# EAGLE board shift2 (EAGLE 5.06)
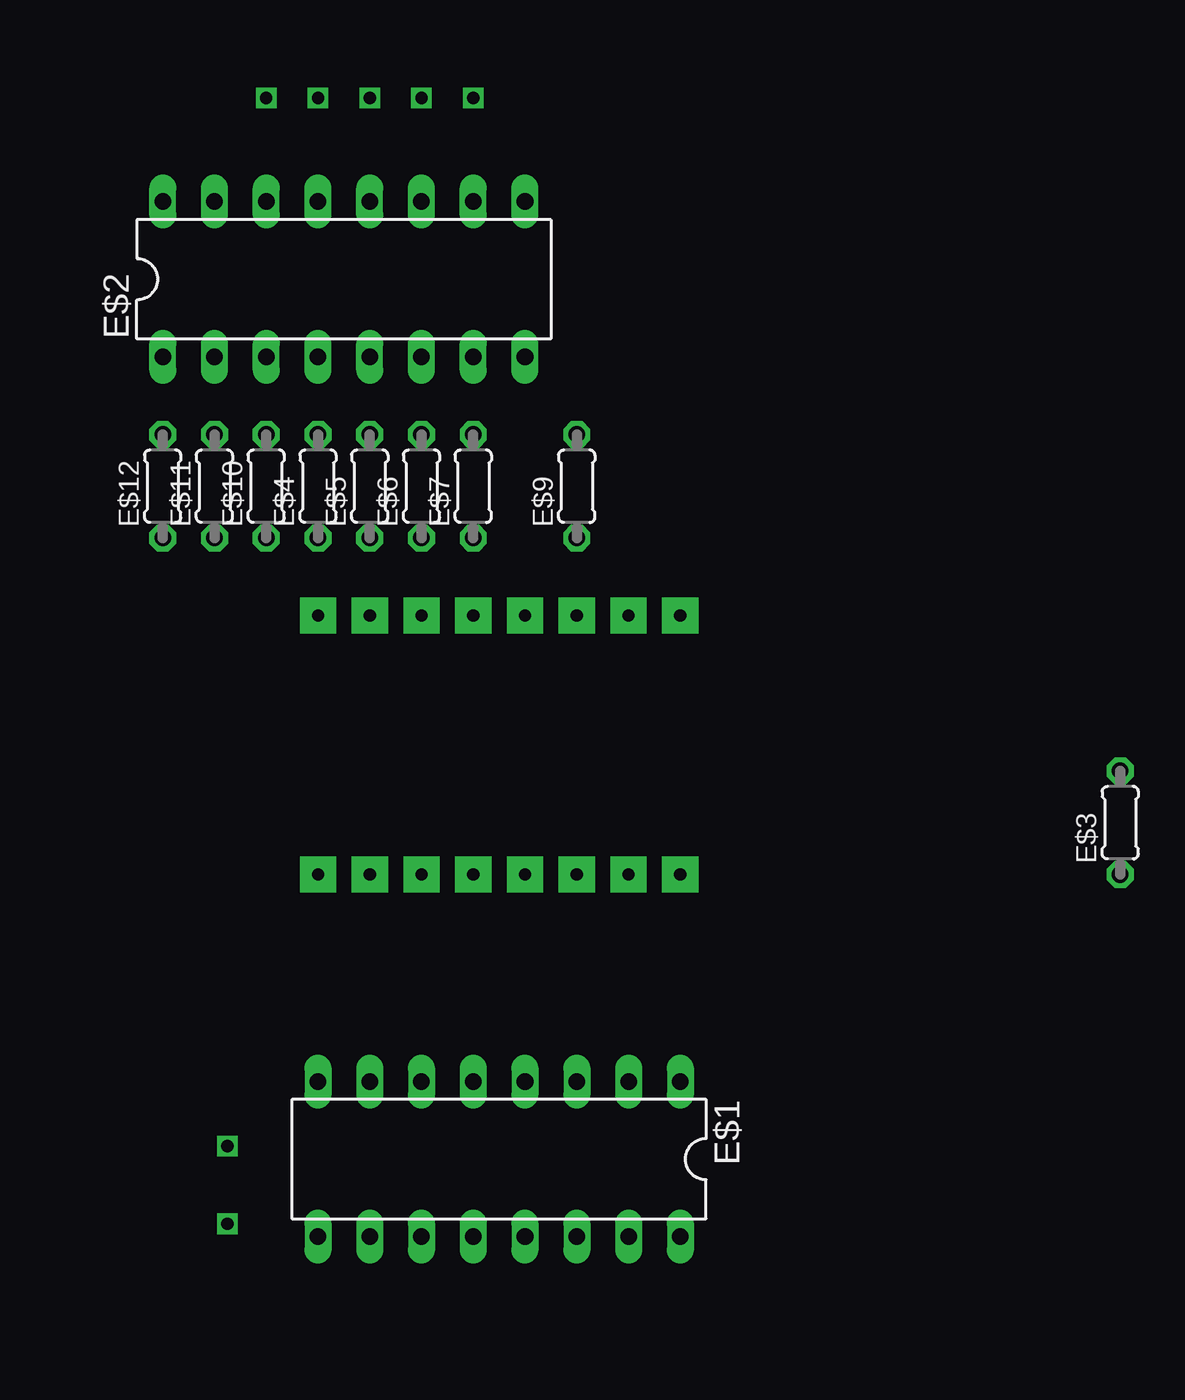
[diagram p0: board, top side]
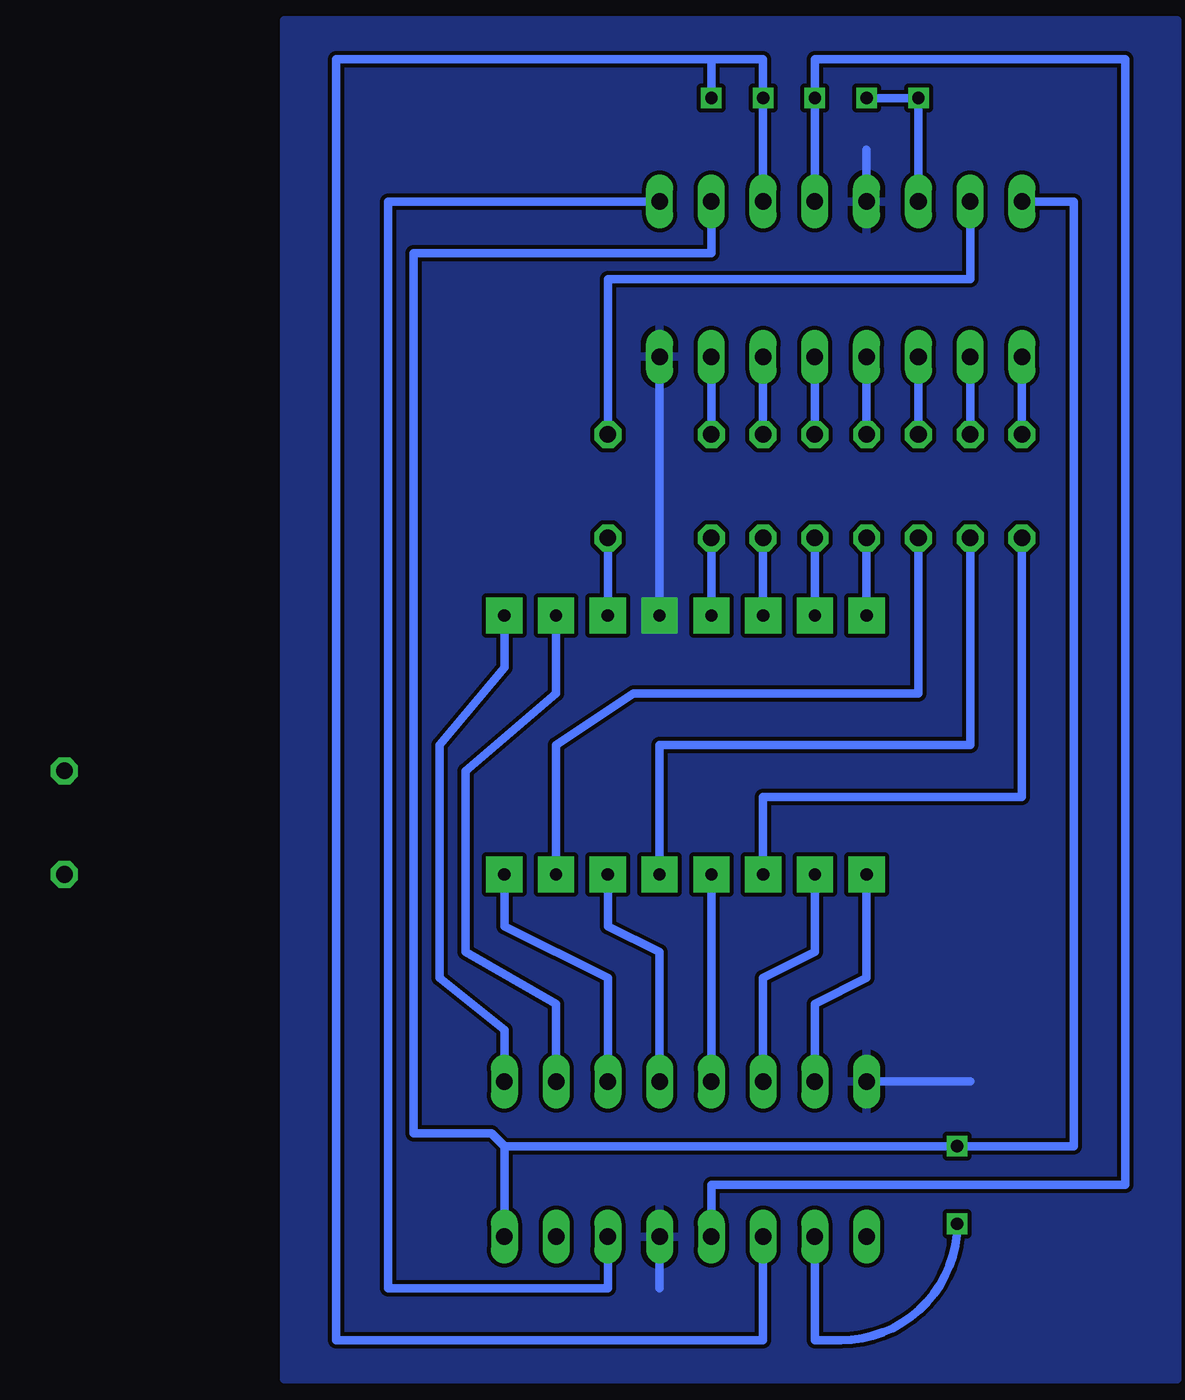
[diagram p1: board, bottom side, seen from below]

No outline drawn. Coordinates in mm, seen from the top.
Copper layers (1*16): Top 0.035mm / dielectric 1.5mm / Bottom 0.035mm
Design rules "default": minimum track width 10mil, minimum drill 24mil, track to track 8mil, track to pad 8mil, pad to pad 8mil, via to via 8mil, smd to smd 8mil, copper to edge 40mil, drill to drill 8mil, minimum pad ring 10mil, minimum via ring 8mil, stop-mask expansion 4mil, vias tented up to drill 0mil, thermal gap 10mil

## Footprints (pad centres in the part's own frame; a part is rotated, then mirrored left to right if it is on the bottom)
DIL16 = drill 0.813 long: 1 -8.89,-3.81; 2 -6.35,-3.81; 3 -3.81,-3.81; 4 -1.27,-3.81; 5 1.27,-3.81; 6 3.81,-3.81; 7 6.35,-3.81; 8 8.89,-3.81; 9 8.89,3.81; 10 6.35,3.81; 11 3.81,3.81; 12 1.27,3.81; 13 -1.27,3.81; 14 -3.81,3.81; 15 -6.35,3.81; 16 -8.89,3.81
0204/5 = drill 0.813 octagon: 1 -2.54,0; 2 2.54,0

## Placement (x,y rotation side)
E$1  [DIL16]  24.13,11.43 180 top
E$2  [DIL16]  16.51,54.61 0 top
E$3  [0204/5]  54.61,27.94 90 top
E$4  [0204/5]  15.24,44.45 90 top
E$5  [0204/5]  17.78,44.45 90 top
E$6  [0204/5]  20.32,44.45 90 top
E$7  [0204/5]  22.86,44.45 90 top
E$9  [0204/5]  27.94,44.45 90 top
E$10  [0204/5]  12.7,44.45 90 top
E$11  [0204/5]  10.16,44.45 90 top
E$12  [0204/5]  7.62,44.45 90 top

## Library data of the parts
E$1 E$2 = 40xx
E$3-E$7 E$9-E$12 = rcl

## Nets
+5V: E$1.16 E$2.16
GND: E$1.8 E$1.13 E$2.8 E$2.13
S$1: E$1.7
S$2: E$1.6
S$3: E$12.1
S$4: E$1.5
S$5: E$11.1
S$6: E$5.1
S$7: E$2.1 E$12.2
S$8: E$1.12 E$2.12
S$9: E$4.1
S$10: E$7.1
S$11: E$6.1
S$12: E$2.15 E$9.2
S$13: E$10.1
S$14: E$1.3
S$15: E$1.2
S$16: E$1.14 E$2.9
S$17: E$1.4
S$18: E$1.1
S$20: E$1.10
S$21: E$2.14
S$22: E$9.1
S$23: E$1.11 E$2.11
S$24: E$2.2 E$11.2
S$25: E$2.3 E$10.2
S$26: E$2.4 E$4.2
S$27: E$2.5 E$5.2
S$28: E$2.6 E$6.2
S$29: E$2.7 E$7.2

## Tracks (layer width: path | path; a pad name or v marks a point on that pad's centre or on a via)
+5V  (via drill 0.6)
  Bottom 0.406: 22.86,57.78 22.86,55.88 37.47,55.88 37.47,12.7 33.66,12.7 33.02,12.06 | 33.02,12.06 E$1.16 | 33.02,12.06 v10.79,12.06 5.08,12.06 5.08,58.42 E$2.16
GND  (via drill 0.6 pad 1.78)
  Bottom 0.406: v25.4,38.1 25.4,46.99 25.4,49.53 E$2.8 | 10.16,15.24 E$1.8 | E$2.13 15.24,60.96 | 25.4,5.08 E$1.13
  pour Bottom: 0,67.31 43.81,67.31 43.81,0.64 0,0.64
S$1  (via drill 0.6 pad 1.78)
  Bottom 0.406: v15.24,25.4 15.24,20.32 17.78,19.05 E$1.7
S$2  (via drill 0.6 pad 1.78)
  Bottom 0.406: v17.78,25.4 17.78,21.59 20.32,20.32 E$1.6
S$3  (via drill 0.6 pad 1.78)
  Bottom 0.406: v20.32,25.4 20.32,29.21 7.62,29.21 E$12.1
S$4  (via drill 0.6 pad 1.78)
  Bottom 0.406: E$1.5 v22.86,25.4
S$5  (via drill 0.6 pad 1.78)
  Bottom 0.406: v25.4,25.4 25.4,31.75 10.16,31.75 E$11.1
S$6  (via drill 0.6 pad 1.78)
  Bottom 0.406: v17.78,38.1 E$5.1
S$7
  Bottom 0.406: E$12.2 E$2.1
S$8  (via drill 0.6)
  Bottom 0.406: E$1.12 22.86,10.16 2.54,10.16 2.54,65.41 17.78,65.41 v17.78,63.5 E$2.12
S$9  (via drill 0.6 pad 1.78)
  Bottom 0.406: v15.24,38.1 E$4.1
S$10  (via drill 0.6 pad 1.78)
  Bottom 0.406: v22.86,38.1 E$7.1
S$11  (via drill 0.6 pad 1.78)
  Bottom 0.406: v20.32,38.1 E$6.1
S$12
  Bottom 0.406: E$2.15 10.16,54.61 27.94,54.61 E$9.2
S$13  (via drill 0.6 pad 1.78)
  Bottom 0.406: v30.48,25.4 30.48,31.75 26.67,34.29 12.7,34.29 E$10.1
S$14  (via drill 0.6 pad 1.78)
  Bottom 0.406: v33.02,25.4 33.02,22.86 27.94,20.32 E$1.3
S$15  (via drill 0.6 pad 1.78)
  Bottom 0.406: v30.48,38.1 30.48,34.29 34.92,30.48 34.92,21.59 30.48,19.05 E$1.2
S$16
  Bottom 0.406: E$2.9 38.73,58.42 38.73,5.08 27.94,5.08 E$1.14
S$17  (via drill 0.6 pad 1.78)
  Bottom 0.406: E$1.4 25.4,21.59 27.94,22.86 v27.94,25.4
S$18  (via drill 0.6 pad 1.78)
  Bottom 0.406: v33.02,38.1 33.02,35.56 36.2,31.75 36.2,20.32 33.02,17.78 E$1.1
S$20  (via drill 0.6)
  Bottom 0.406: E$1.10 17.78,2.54 16.51,2.54 arc-90 v10.79,8.26
S$21  (via drill 0.6)
  Bottom 0.406: E$2.14 v12.7,63.5 v15.24,63.5
S$22  (via drill 0.6 pad 1.78)
  Bottom 0.406: v27.94,38.1 E$9.1
S$23  (via drill 0.6)
  Bottom 0.406: E$2.11 v20.32,63.5 20.32,65.41 22.86,65.41 | 22.86,65.41 41.27,65.41 41.27,2.54 20.32,2.54 E$1.11 | 22.86,65.41 v22.86,63.5
S$24
  Bottom 0.406: E$11.2 E$2.2
S$25
  Bottom 0.406: E$10.2 E$2.3
S$26
  Bottom 0.406: E$4.2 E$2.4
S$27
  Bottom 0.406: E$5.2 E$2.5
S$28
  Bottom 0.406: E$6.2 E$2.6
S$29
  Bottom 0.406: E$7.2 E$2.7